# EAGLE board Stator_PCB (EAGLE 7.4.0)
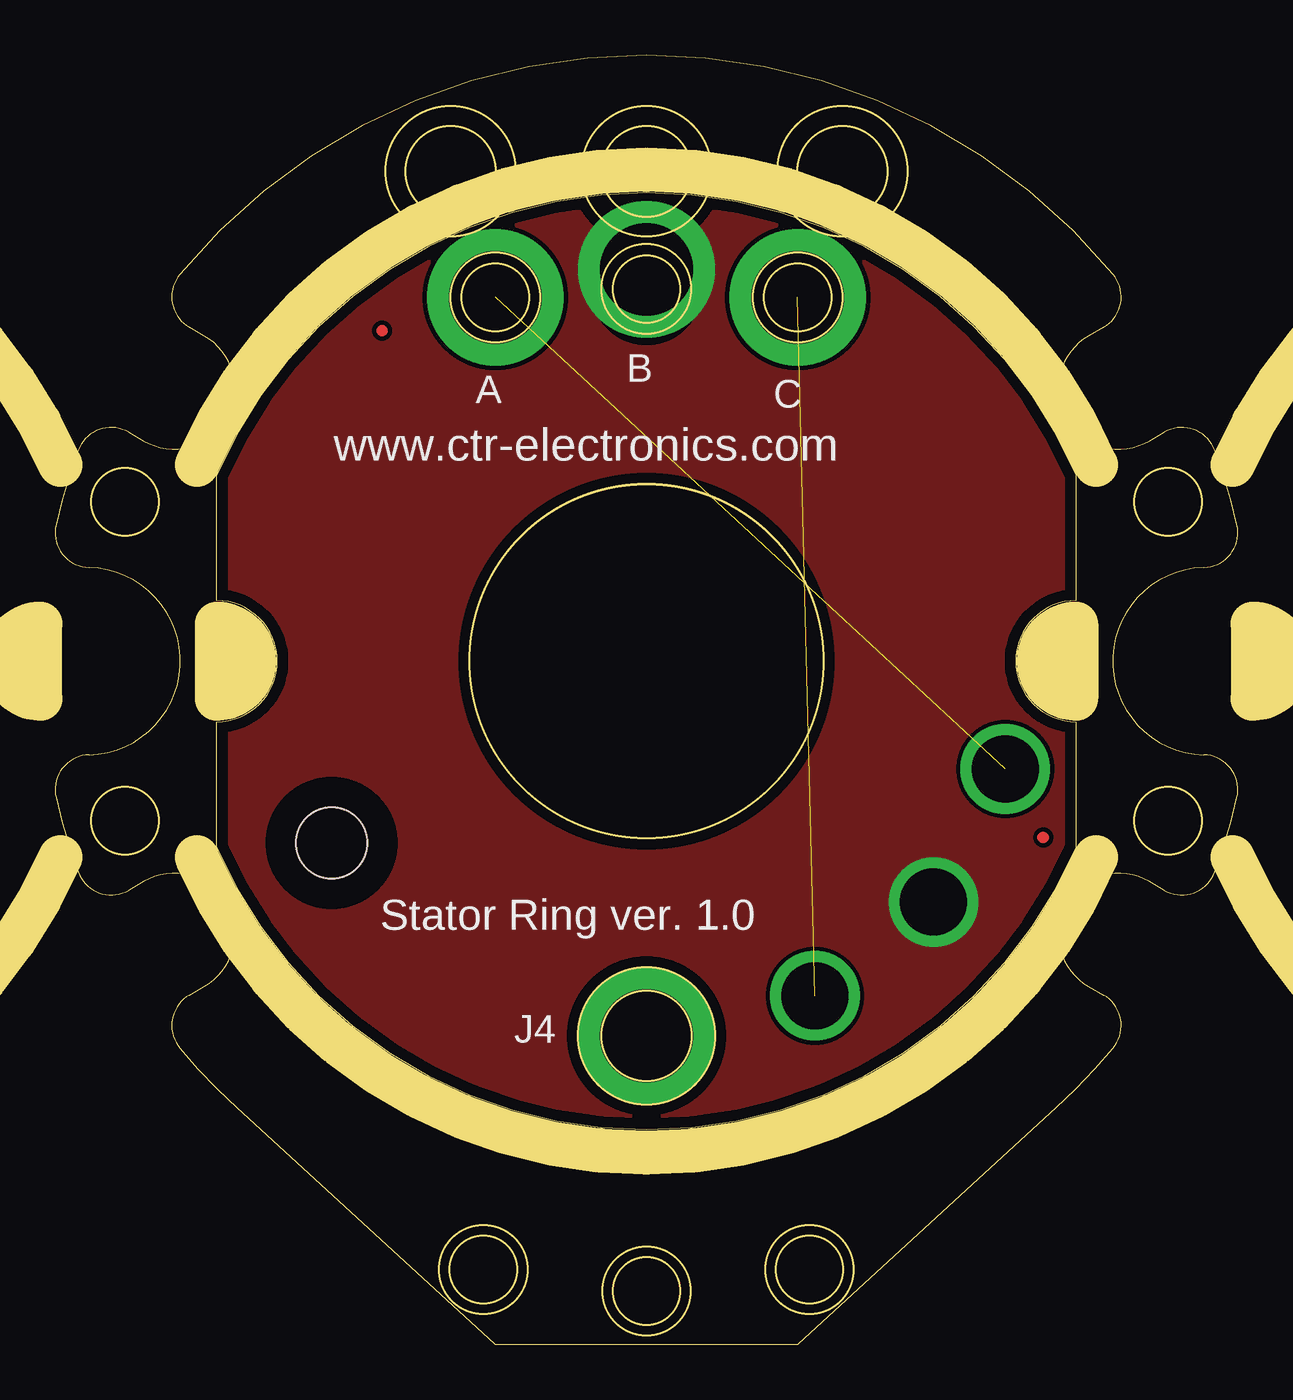
[diagram p0: board, top side]
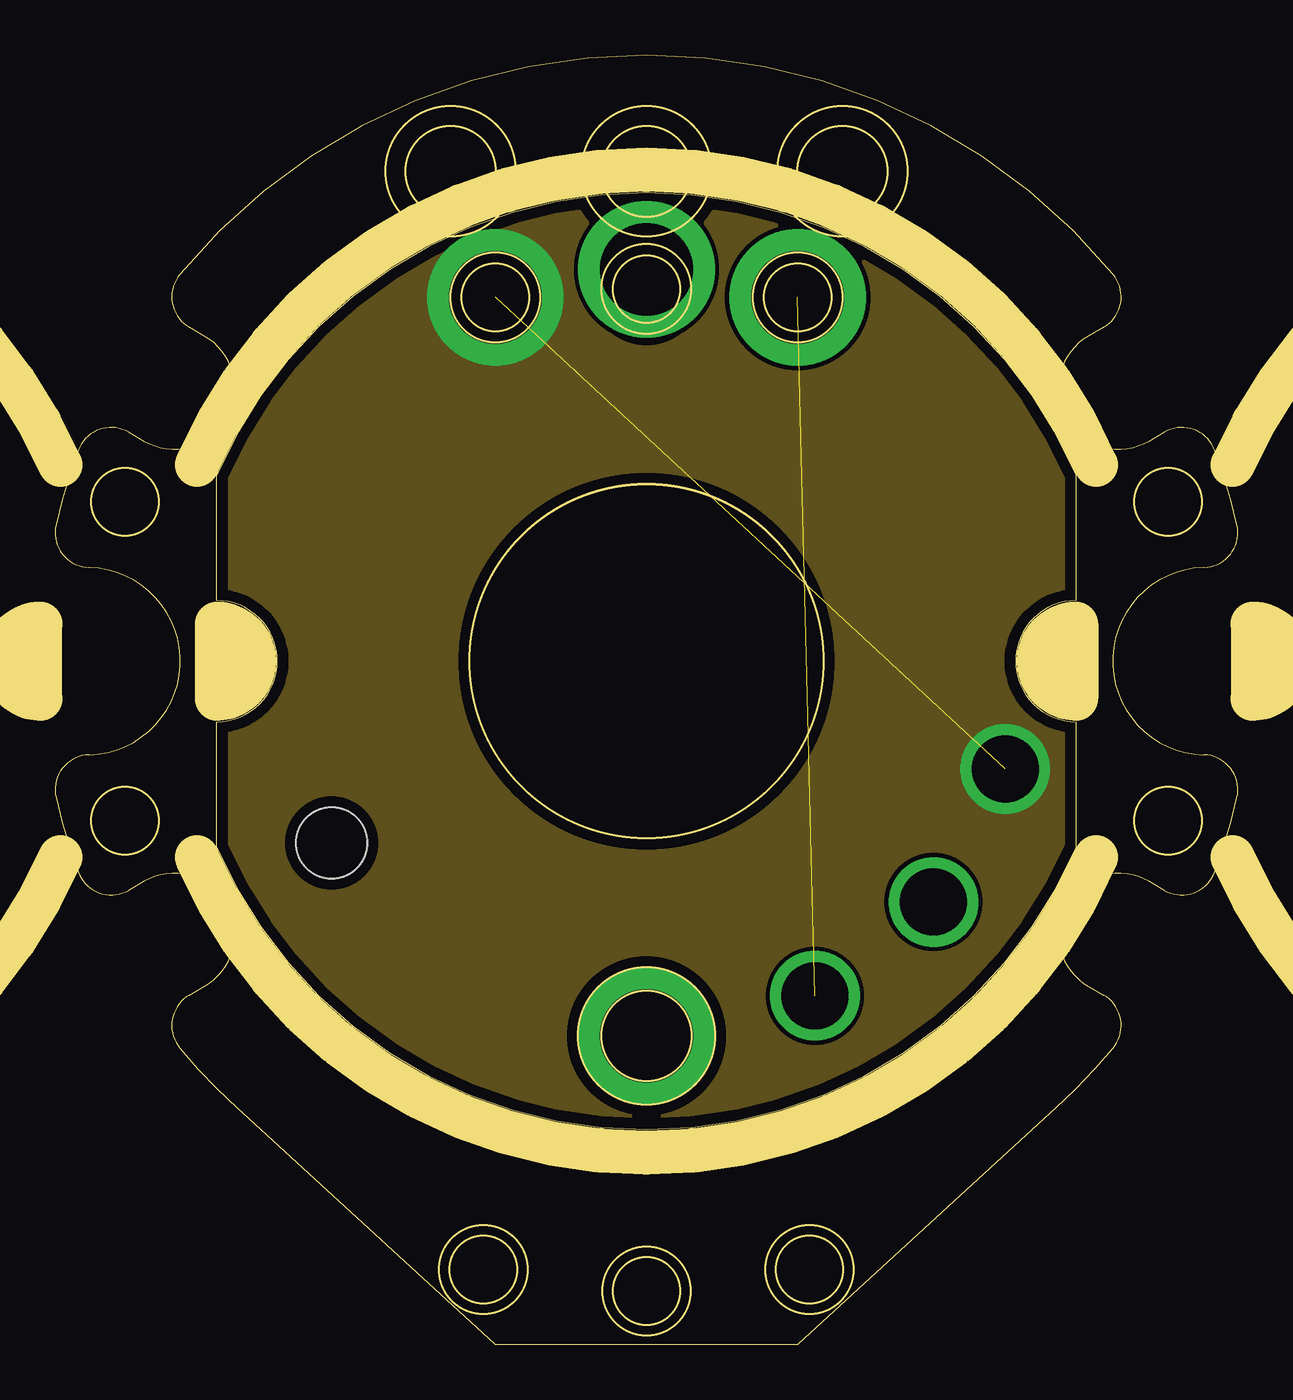
[diagram p1: board, inner layer Route2]
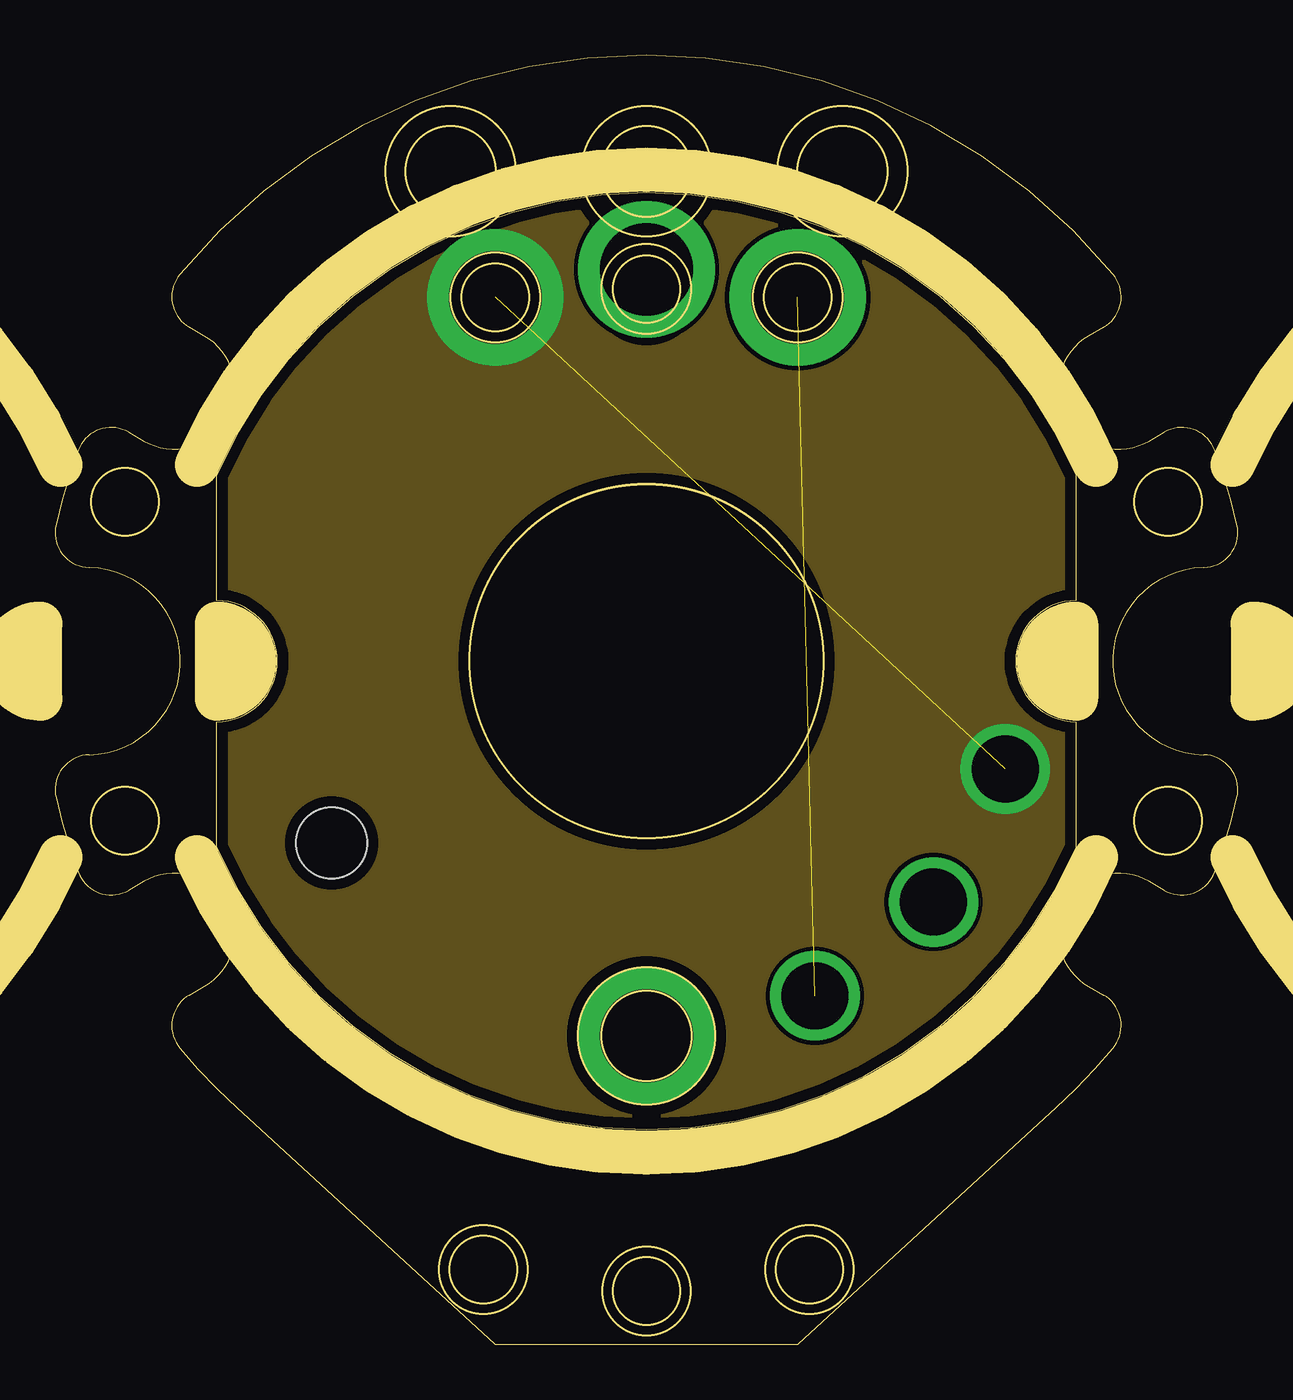
[diagram p2: board, inner layer Route3]
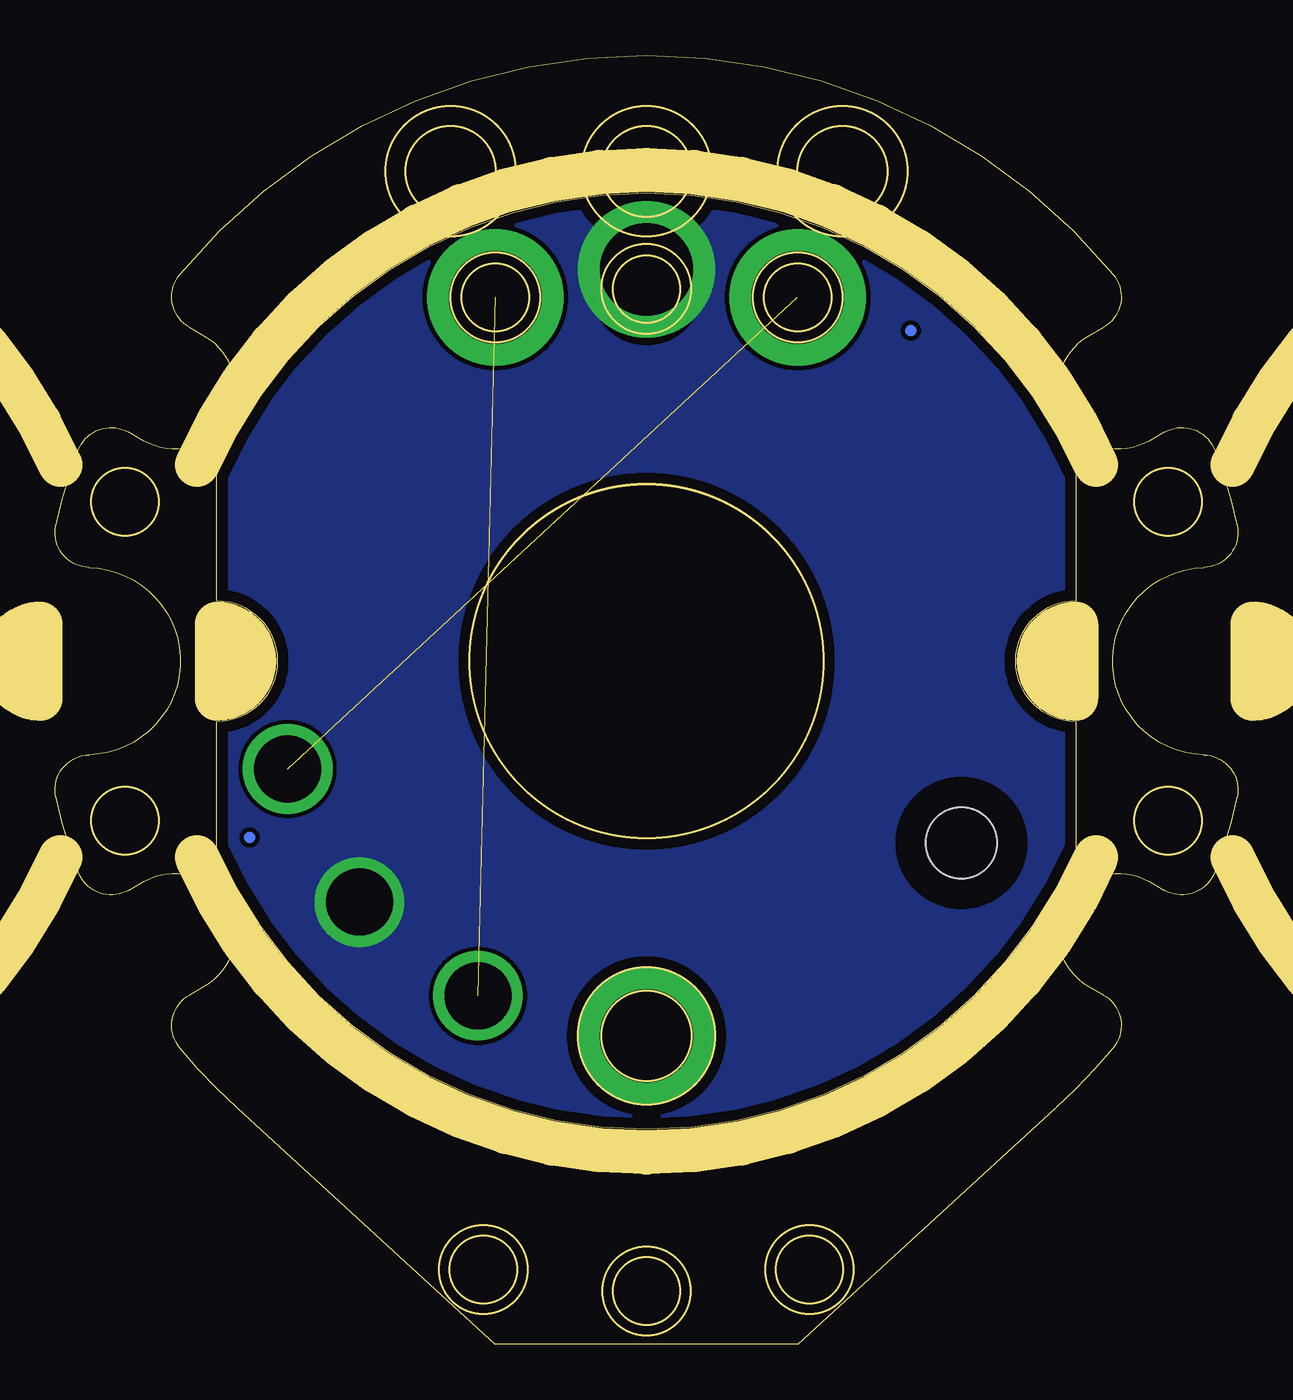
[diagram p3: board, bottom side, seen from below]

Size 53.67 x 58.5 mm. Coordinates in mm from the lower left corner, seen from the top.
Outline: 46.33,22.55 46.33,28.25 arc-180 46.33,33.75 46.33,39.45 arc133 7.33,39.45 7.33,33.75 arc-180 7.33,28.25 7.33,22.55 arc133 46.33,22.55
Outline: 3.33,41.39 4.02,40.99 arc180 6.77,45.76 6.08,46.16 arc-100 5.66,48.54 arc-101 48.01,48.54 arc-100 47.58,46.16 46.89,45.76 arc180 49.64,40.99 50.33,41.39 arc-100 52.61,40.57 arc-7 53.63,37.19 arc-102 52.12,35.25 arc177 52.12,26.75 arc-102 53.63,24.81 arc-7 52.61,21.43 arc-100 50.33,20.61 49.64,21.01 arc180 46.89,16.24 47.58,15.85 arc-100 48.01,13.46 arc-8 45.41,10.73 33.71,0 19.96,0 8.25,10.73 arc-8 5.66,13.46 arc-100 6.08,15.85 6.77,16.24 arc180 4.02,21.01 3.33,20.61 arc-100 1.05,21.43 arc-7 0.04,24.81 arc-102 1.54,26.75 arc177 1.54,35.25 arc-102 0.04,37.19 arc-7 1.05,40.57 arc-100 3.33,41.39
Outline: circle at 26.83,31 radius 8
Outline: circle at 26.83,14 radius 2.04
Outline: circle at 26.83,14 radius 3.1
Outline: circle at 19.44,3.4 radius 1.52
Outline: circle at 19.44,3.4 radius 2
Outline: circle at 34.23,3.4 radius 1.52
Outline: circle at 34.23,3.4 radius 2
Outline: circle at 26.83,2.43 radius 1.52
Outline: circle at 26.83,2.43 radius 2
Outline: circle at 19.98,47.51 radius 1.52
Outline: circle at 19.98,47.51 radius 2.02
Outline: circle at 33.69,47.51 radius 1.52
Outline: circle at 33.69,47.51 radius 2.02
Outline: circle at 26.83,47.88 radius 2.02
Outline: circle at 26.83,47.88 radius 1.52
Outline: circle at 26.83,53.23 radius 2.04
Outline: circle at 26.83,53.23 radius 2.94
Outline: circle at 17.94,53.23 radius 2.04
Outline: circle at 17.94,53.23 radius 2.94
Outline: circle at 35.72,53.23 radius 2.94
Copper layers (1+2*3+16): Top 0.07mm / dielectric 6mil / Route2 0.07111875mm / dielectric 0.99821875mm / Route3 0.035mm / dielectric 6mil / Bottom 0.035mm
Design rules "default *": minimum track width 7mil, minimum drill 8mil, track to track 0.1968mm, track to pad 0.1968mm, pad to pad 0.1968mm, via to via 0.1968mm, smd to smd 0.1968mm, copper to edge 20mil, drill to drill 8mil, minimum pad ring 5mil, minimum via ring 5mil, stop-mask expansion 2mil, vias tented up to drill 20mil, thermal gap 10mil
Holes 3.2 mm at 12.54,22.75
tRestrict: area 9.5,19.8 to 15.5,25.8
bRestrict: area 9.5,19.8 to 15.5,25.8
Milling: 24 lines

## Footprints (pad centres in the part's own frame; a part is rotated, then mirrored left to right if it is on the bottom)
4883 = drill 4.2 pad 6.2: P$1 0,0

## Placement (x,y rotation side)
A  48834883  [4883]  19.98,47.51 0 top
B  48834883  [4883]  26.83,48.78 0 top
C  48834883  [4883]  33.69,47.51 0 top
FID1  [20_MIL_FID]  14.83,46 0 top
FID2  [20_MIL_FID]  44.83,23 0 top
J4  48834883  [4883]  26.83,14 0 top

## Library data of the parts
A B C J4 = KEYSTONE
FID1 FID2 = fiducials

## Nets
A: A.P$1
B: B.P$1
C: C.P$1
NC: J4.P$1

## Tracks (layer width: path | path; a pad name or v marks a point on that pad's centre or on a via)
A  (via drill 3.05 pad 4)  (1 unrouted)
  other vias: 43.11,26.11
  pour Route2 (no thermals): 7.1,52.25 46.83,52.25 46.83,9.51 7.1,9.51
  pour Route3 (no thermals): 7.1,52.25 46.83,52.25 46.83,9.51 7.1,9.51
B  (via drill 3.05 pad 4)
  other vias: 39.86,20.07
  pour Bottom (no thermals): 7.1,52.25 46.83,52.25 46.83,9.51 7.1,9.51
  pour Top (no thermals): 7.1,52.25 46.83,52.25 46.83,9.51 7.1,9.51
C  (via drill 3.05 pad 4)  (1 unrouted)
  other vias: 34.48,15.82

## Text on the board
tPlace: www.ctr-electronics.com | Stator Ring ver. 1.0
Panel: Dimensions in inches unless otherwise noted. | PCB manufacturer tooling holes | 4 places | V-score | Router